# EAGLE board breakout-board-v3 (EAGLE 6.5.0)
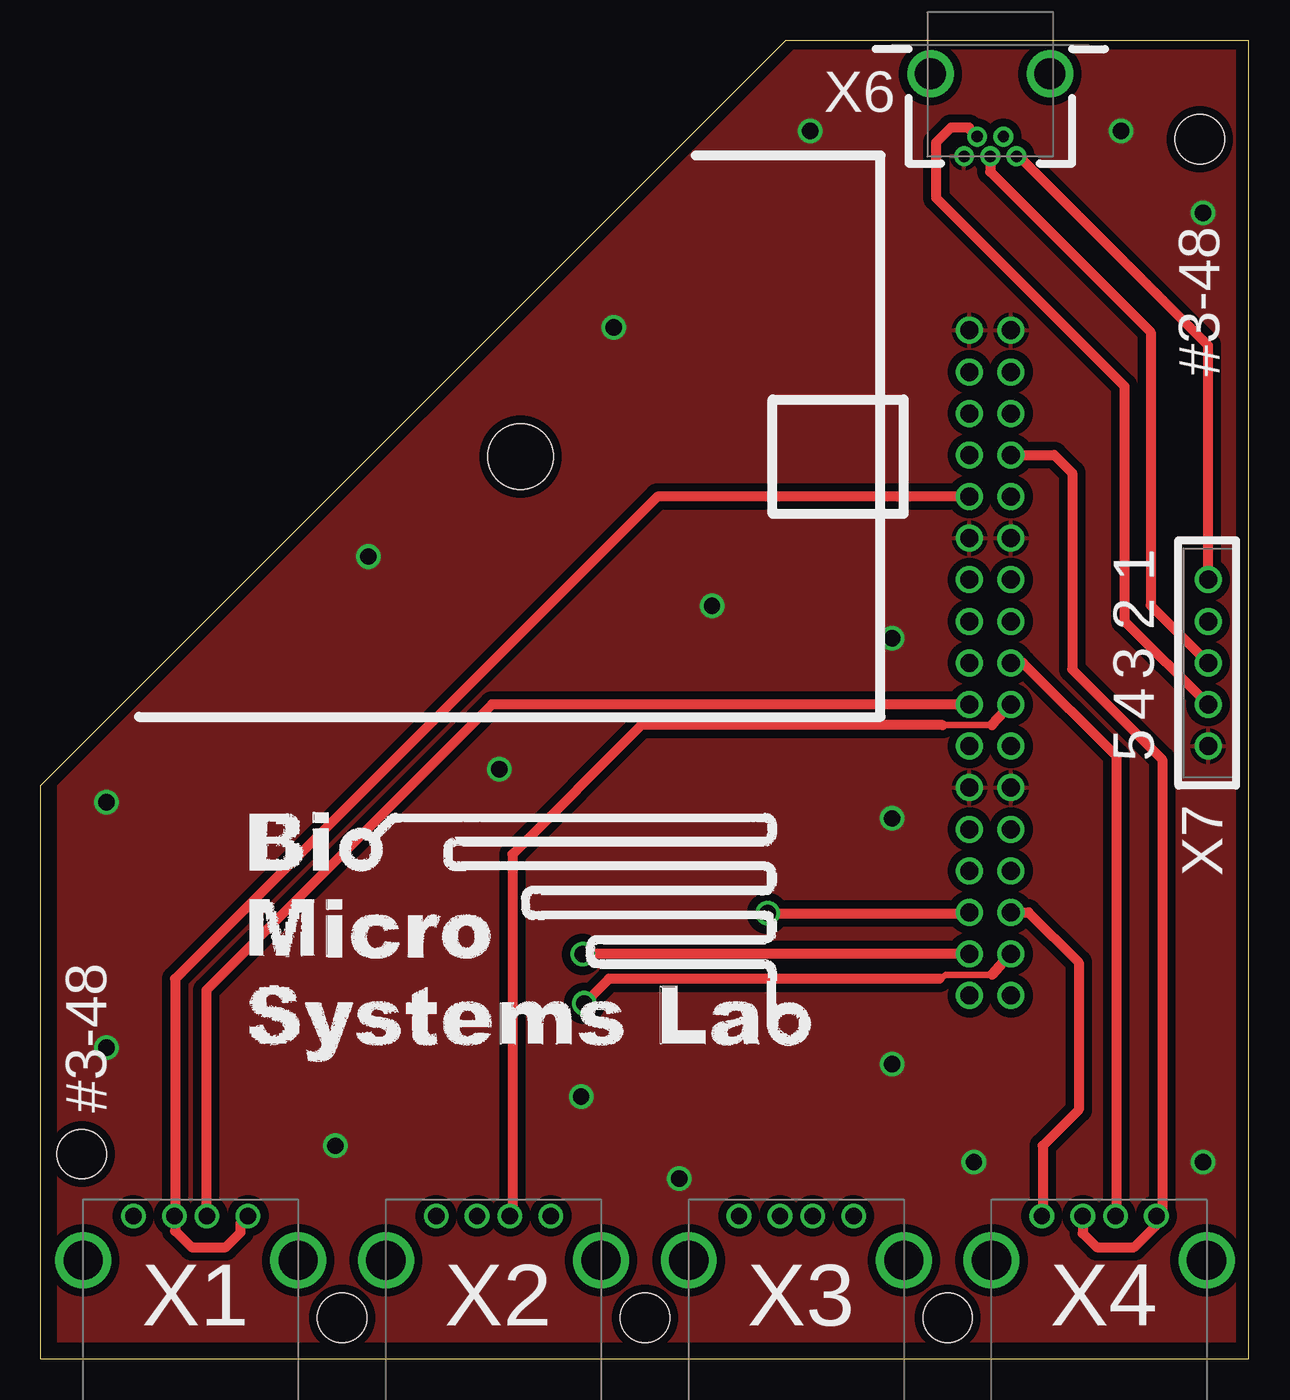
[diagram p0: board, top side]
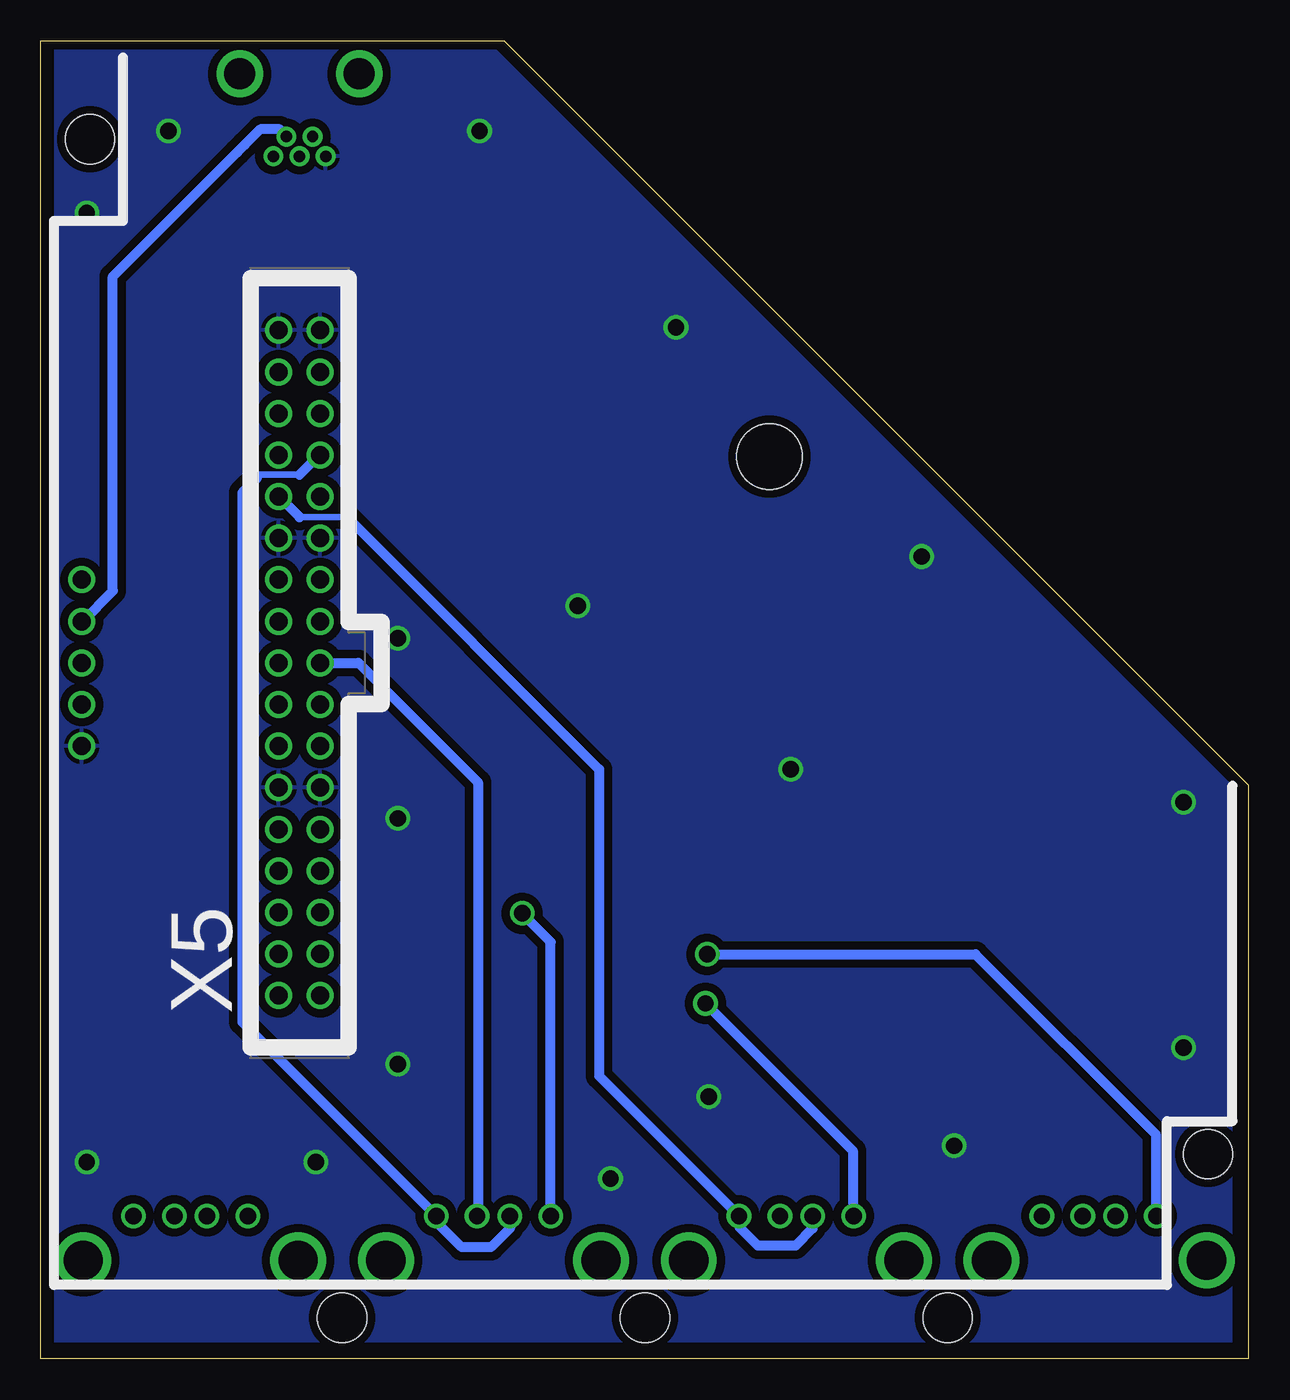
[diagram p1: board, bottom side, seen from below]

Size 73.8 x 80.5 mm. Coordinates in mm from the lower left corner, seen from the top.
Outline: 0,0 73.8,0 73.8,80.5 45.5,80.5 0,35 0,0
Copper layers (1*16): Top 0.035mm / dielectric 1.5mm / Bottom 0.035mm
Design rules "default *": minimum track width 10mil, minimum drill 24mil, track to track 10mil, track to pad 10mil, pad to pad 10mil, via to via 10mil, smd to smd 8mil, copper to edge 20mil, drill to drill 7mil, minimum pad ring 10mil, minimum via ring 8mil, stop-mask expansion 4mil, vias tented up to drill 0mil, thermal gap 10mil
Holes 3 mm at 18.4,2.5 36.9,2.5 55.4,2.5 70.8,74.5 2.5,12.5
Holes 4 mm at 29.3,55.1

## Footprints (pad centres in the part's own frame; a part is rotated, then mirrored left to right if it is on the bottom)
TE_CONNECTIVITY_292303-1 = drill 1: 1 -3.5,2.71; 2 -1,2.71; 3 1,2.71; 4 3.5,2.71 | drill 2.4: CHAS@1 -6.57,0; CHAS@2 6.57,0
SULLINS_SFH11-PBPC-D17-ST-BK = drill 1.1: 1 20.32,1.27; 2 20.32,-1.27; 3 17.78,1.27; 4 17.78,-1.27; 5 15.24,1.27; 6 15.24,-1.27; 7 12.7,1.27; 8 12.7,-1.27; 9 10.16,1.27; 10 10.16,-1.27; 11 7.62,1.27; 12 7.62,-1.27; 13 5.08,1.27; 14 5.08,-1.27; 15 2.54,1.27; 16 2.54,-1.27; 17 0,1.27; 18 0,-1.27; 19 -2.54,1.27; 20 -2.54,-1.27; 21 -5.08,1.27; 22 -5.08,-1.27; 23 -7.62,1.27; 24 -7.62,-1.27; 25 -10.16,1.27; 26 -10.16,-1.27; 27 -12.7,1.27; 28 -12.7,-1.27; 29 -15.24,1.27; 30 -15.24,-1.27; 31 -17.78,1.27; 32 -17.78,-1.27; 33 -20.32,1.27; 34 -20.32,-1.27
MOLEX_0548190519 = drill 0.7: 1 5.05,1.6; 2 3.85,0.8; 3 5.05,0; 4 3.85,-0.8; 5 5.05,-1.6 | drill 1.9 pad 2.54: CHAS@1 0,3.65; CHAS@2 0,-3.65
5-PIN-HEADER = drill 1.1: 1 -5.08,0; 2 -2.54,0; 3 0,0; 4 2.54,0; 5 5.08,0

## Placement (x,y rotation side)
X1  Sensor 1  [TE_CONNECTIVITY_292303-1]  9.15,6 0 top
X2  Sensor 2  [TE_CONNECTIVITY_292303-1]  27.65,6 0 top
X3  Sensor 3  [TE_CONNECTIVITY_292303-1]  46.15,6 0 top
X4  Sensor 4  [TE_CONNECTIVITY_292303-1]  64.65,6 0 top
X5  Multiplexer_CON1  [SULLINS_SFH11-PBPC-D17-ST-BK]  58,42.5 270 bottom
X6  [MOLEX_0548190519]  58,78.5 270 top
X7  [5-PIN-HEADER]  71.31,42.5 270 top

## Library data of the parts
X1-X7 = sensor-breakout-boards

## Nets
CE1: X1.1 X5.3
CE2: X2.1 X5.4
CE3: X3.1 X5.5
CE4: X4.1 X5.6
D+: X6.3 X7.3
D-: X6.2 X7.2
GND: X5.11 X5.12 X5.23 X5.24 X5.33 X5.34 X6.5 X7.5
ID: X6.4 X7.4
RE1: X1.3 X5.15
RE2: X2.3 X5.16
RE3: X3.3 X5.17
RE4: X4.3 X5.18
VCC: X6.1 X7.1
WE1: X1.2 X1.4 X5.25
WE2: X2.2 X2.4 X5.26
WE3: X3.2 X3.4 X5.27
WE4: X4.2 X4.4 X5.28

## Tracks (layer width: path | path; a pad name or v marks a point on that pad's centre or on a via)
CE1  (via drill 1)
  Top 0.61: X5.3 33.12,24.72 v33.1,24.7
  Bottom 0.61: v33.1,24.7 16.7,24.7 5.7,13.7 5.7,8.76 X1.1
CE2  (via drill 1)
  Top 0.406: 58.1,23.45 55.3,23.45 54.9,23.2
  Top 0.61: X5.4 59.22,24.72 58.1,23.45 | 54.9,23.2 34.7,23.2 v33.2,21.7
  Bottom 0.61: v33.2,21.7 24.2,12.7 24.2,8.76 X2.1
CE3  (via drill 1)
  Top 0.61: v44.4,27.2 56.67,27.2 X5.5
  Bottom 0.61: X3.1 42.65,25.45 v44.4,27.2
CE4
  Top 0.61: X4.1 61.2,8.76 61.2,13 63.4,15.2 63.4,24.2 60.34,27.26 X5.6
D+
  Top 0.61: X6.3 58,72.5 67.8,62.7 67.8,46.01 X7.3
D-
  Bottom 0.61: X6.2 58.8,74.7 59.2,75.1 60.4,75.1 61.35,74.15 61.8,73.7 69.4,66.1 69.4,46.9 71.26,45.04 X7.2
GND  (via drill 1)
  other vias: 4,19 4,34 18,13 33,16 39,11 52,18 57,12 71,12 52,33 28,36 20,49 41,46 52,44 35,63 47,75 66,75 71,70
  pour Bottom (isolate 0.5): 73,80 46,80 1,35 1,1 73,1
  pour Top (isolate 0.5): 73,80 46,80 1,35 1,1 73,1
ID
  Top 0.61: X7.4 66.2,45.07 66.2,59.4 54.7,70.9 54.7,74.3 55.6,75.2 56.7,75.2 56.7,75.15 X6.4
  Bottom 0.61: X7.4 71.31,39.99
RE1
  Top 0.61: X5.15 27.56,39.96 10.1,22.5 10.1,8.76 X1.3
RE2
  Top 0.406: 58.1,38.7 55.1,38.7
  Top 0.61: X5.16 58.1,38.7 | 55.1,38.7 36.7,38.7 28.8,30.8 28.8,8.86 X2.3
RE3
  Bottom 0.61: X5.17 54.4,42.5 47.1,35.2 47.1,8.76 X3.3
RE4
  Top 0.61: X5.18 60,42.5 65.7,36.8 65.7,8.76 X4.3
VCC
  Top 0.61: X6.1 59.75,73.45 71.3,61.9 X7.1
WE1
  Top 0.61: X5.25 37.66,52.66 8.2,23.2 8.2,8.76 | 8.2,8.76 X1.2 | 8.2,8.76 8.2,7.8 9.2,6.8 11.3,6.8 12.2,7.7 12.2,8.26 X1.4
WE2
  Bottom 0.406: 58,51.4 55.1,51.4
  Bottom 0.61: X5.26 58,51.4 | 55.1,51.4 39.7,36 39.7,17.26 X2.4 31.1,8.66 31.1,8 30,6.9 27.7,6.9 26.65,7.95 X2.2
WE3
  Bottom 0.406: 58,54 60.4,54 60.6,53.8
  Bottom 0.61: X5.27 56.8,55.2 58,54 | 60.6,53.8 61.5,52.9 61.5,20.56 X3.4 49.4,8.46 49.4,8.1 48.1,6.8 46.3,6.8 45.15,7.95 X3.2
WE4
  Top 0.61: 68.3,8.86 X4.4 | X4.2 63.65,7.65 64.5,6.8 66.8,6.8 68.1,8.1 68.1,8.66 X4.4 | X5.28 61.9,55.2 63,54.1 63,42.1 68.5,36.6 68.5,9.06 X4.4

## Text on the board
tPlace: #3-48 | 1 | 2 | 3 | 4 | 5 | #3-48